# Altium PCB Hub_card.PcbDoc
Units mm, origin at the board's own origin, x right, y up, seen from the top; angles counter-clockwise.
Board outline 70 x 70 mm, 2 copper layers (Top Layer, Bottom Layer); 64 components, 47 nets, 137 pads, 8 vias.
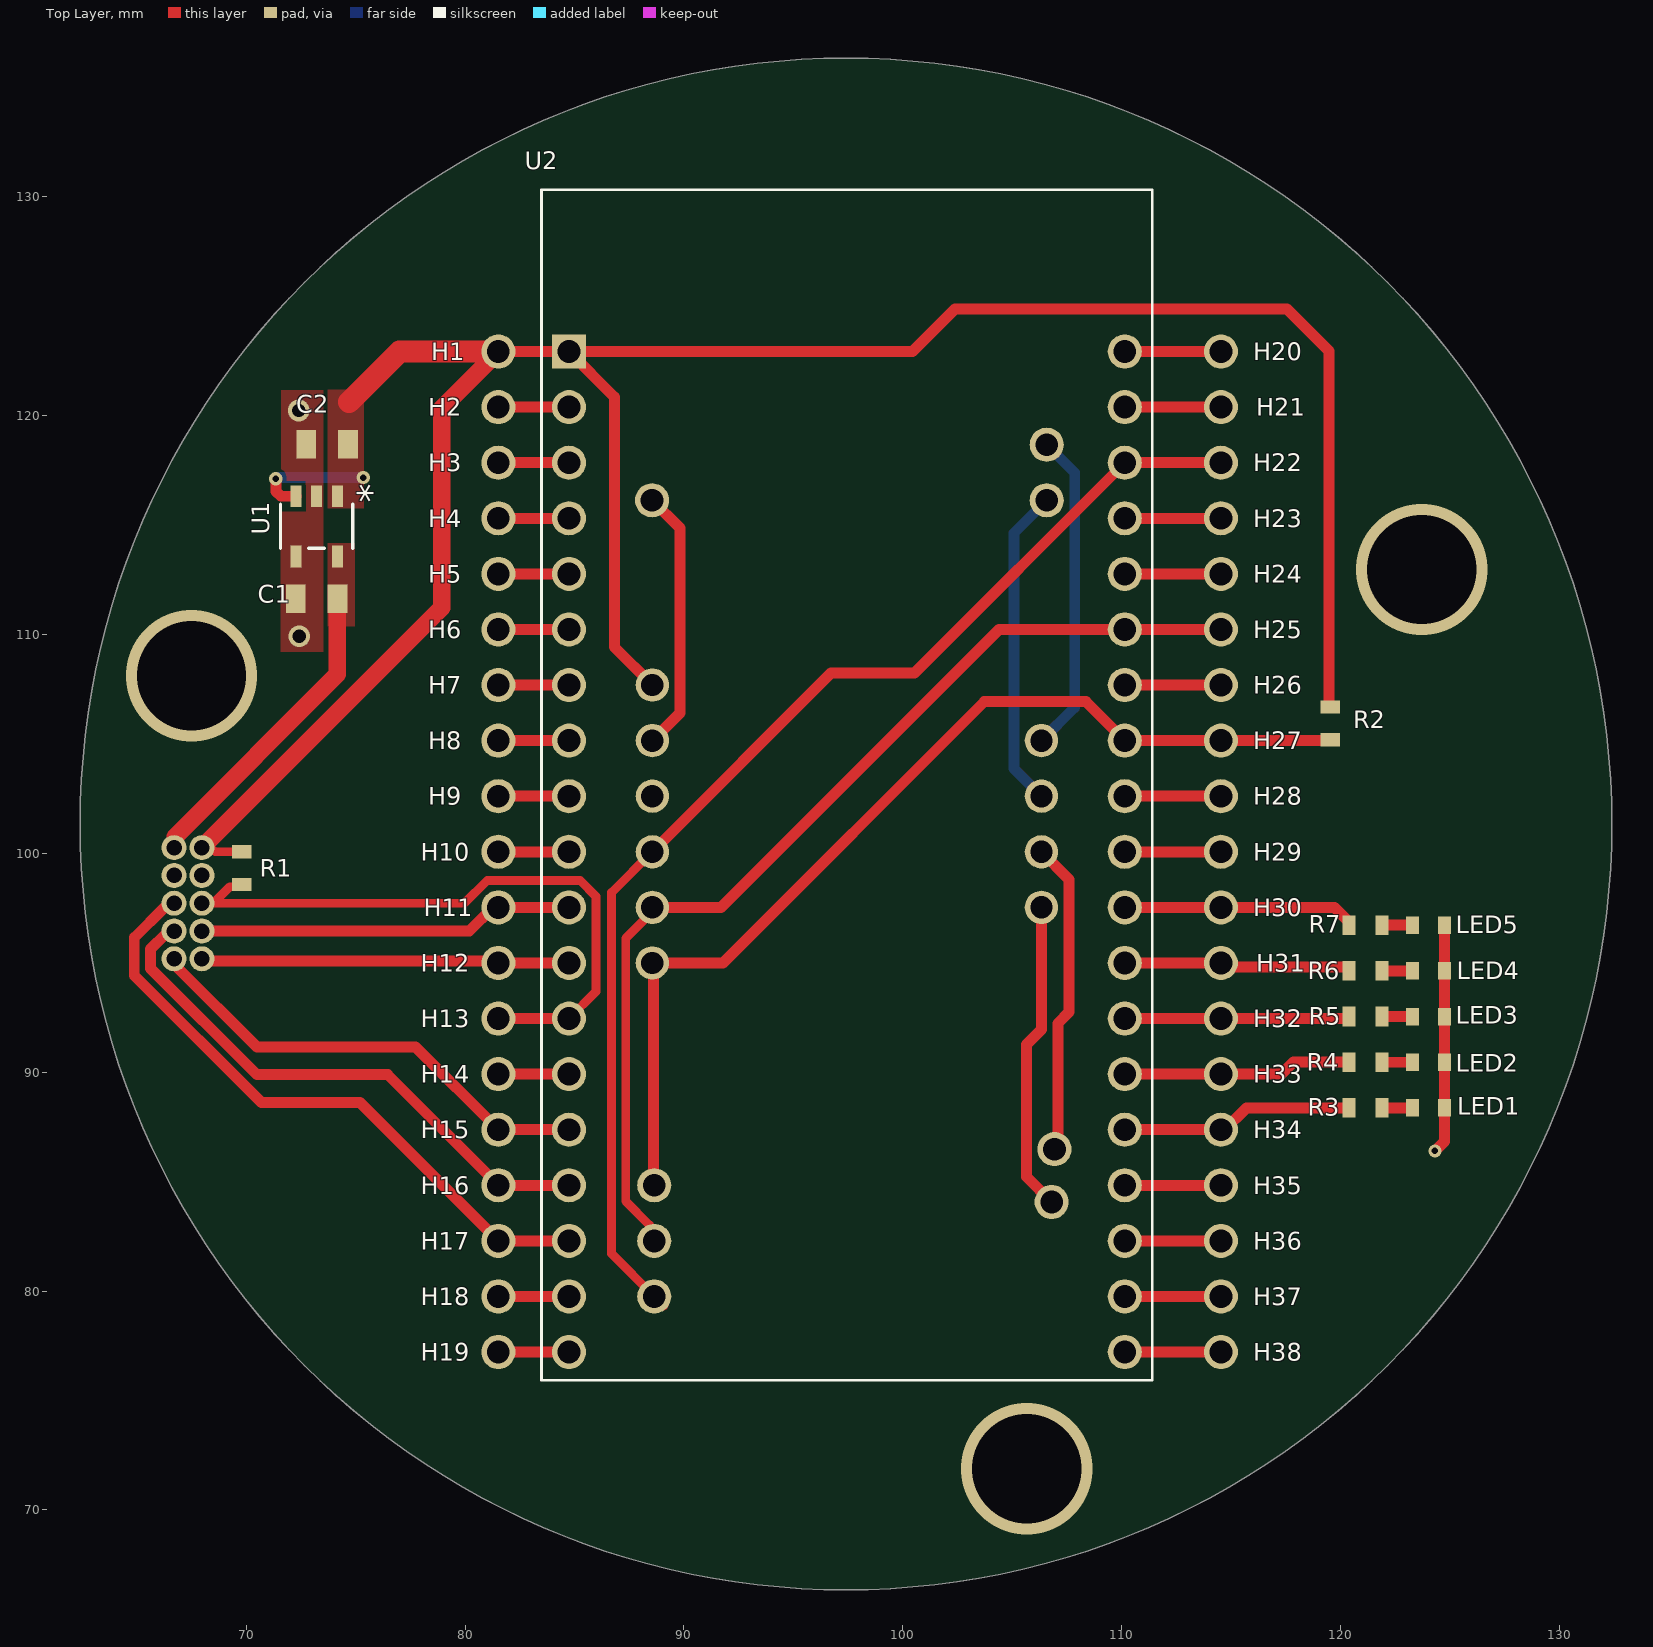
[diagram p0: Top Layer view]
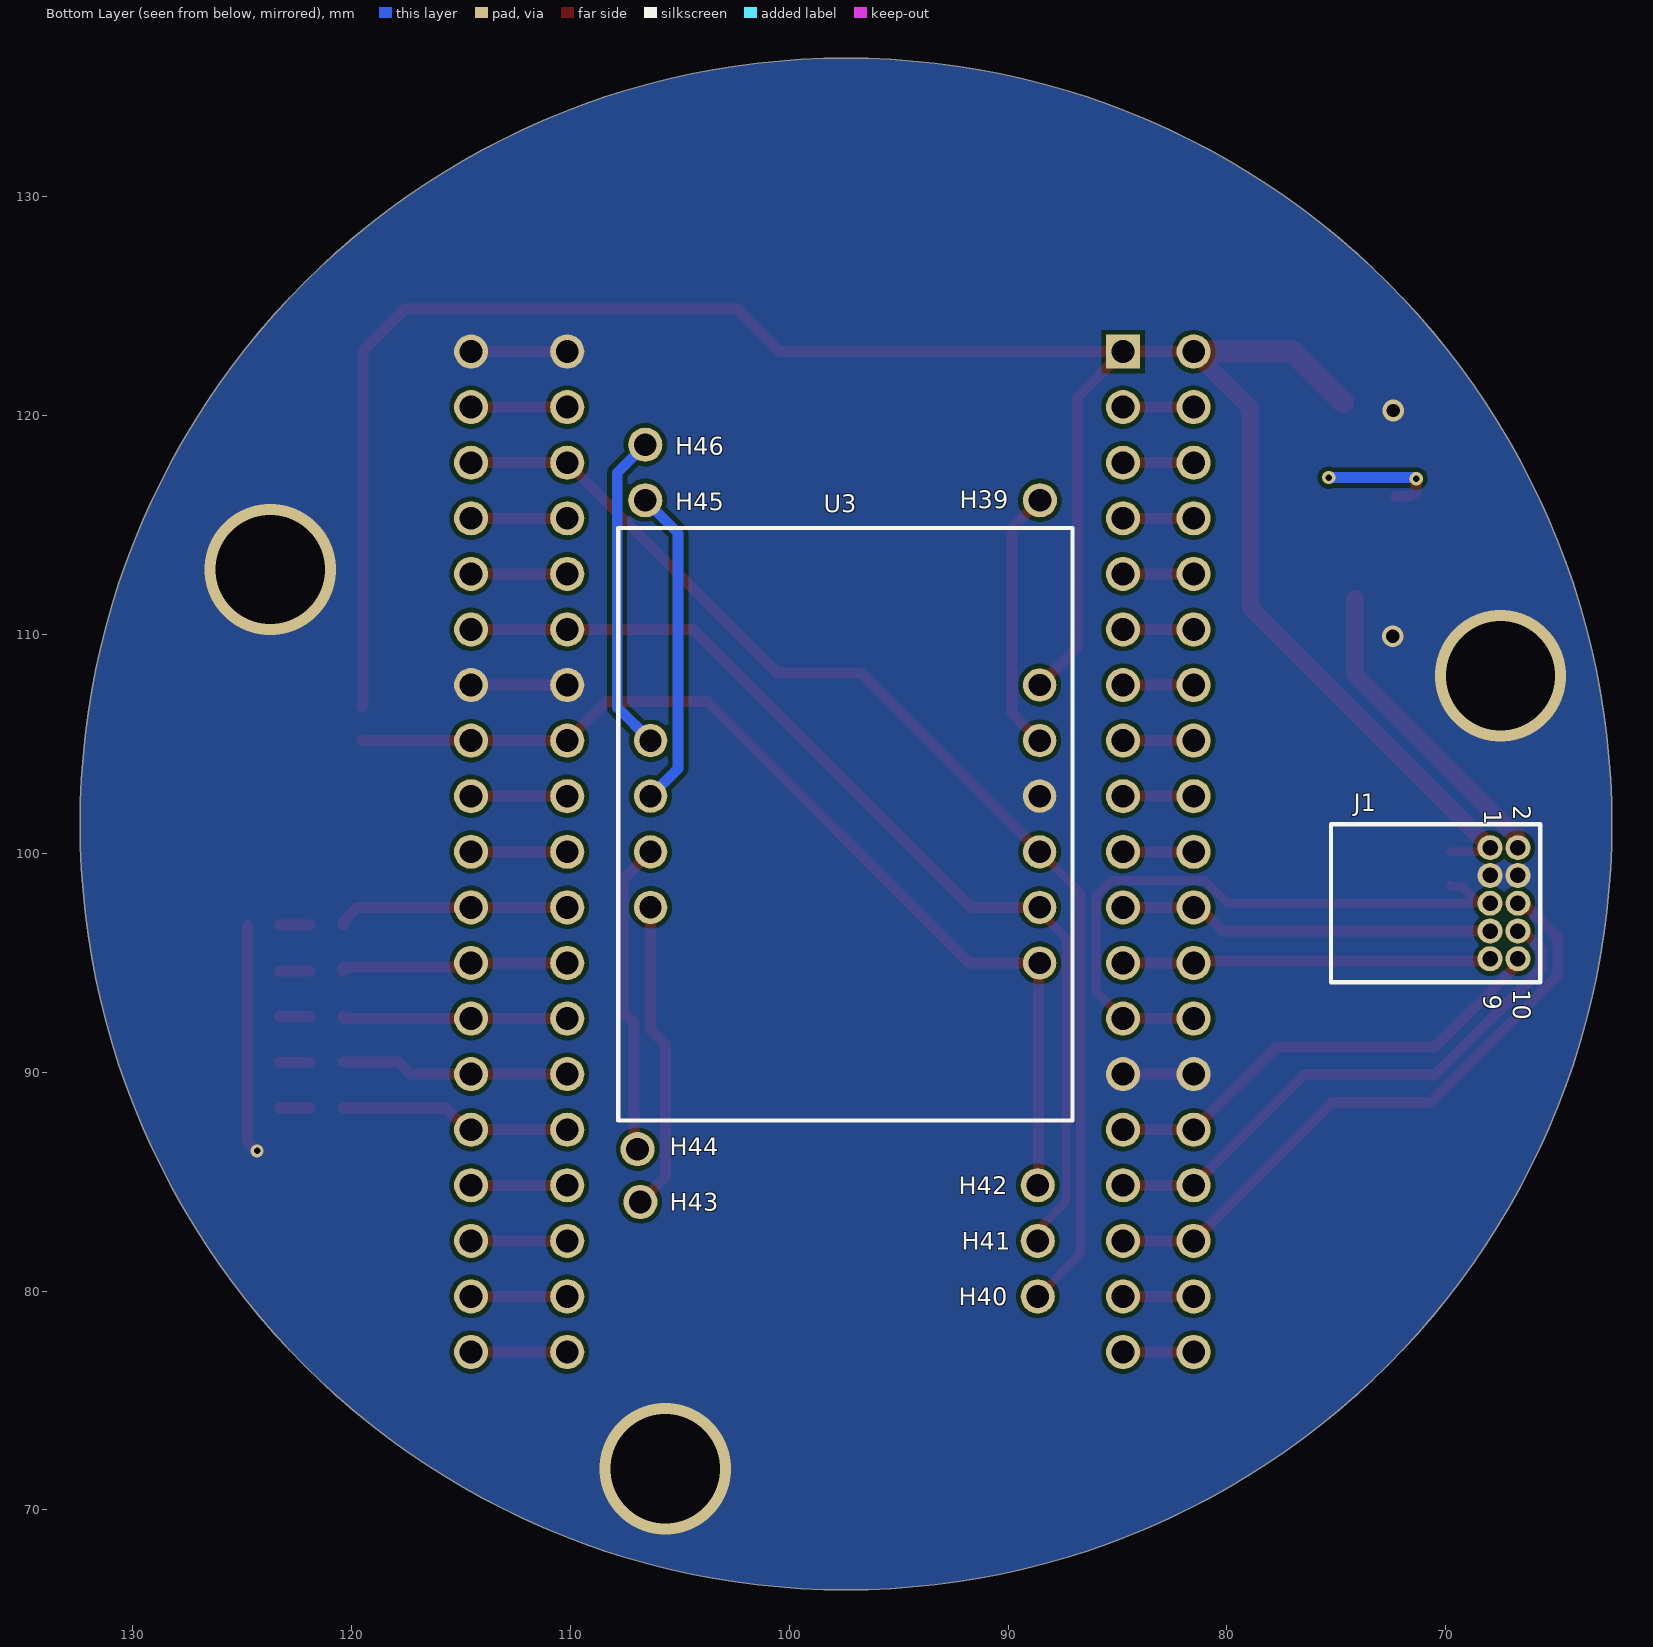
[diagram p1: Bottom Layer view, seen from below]
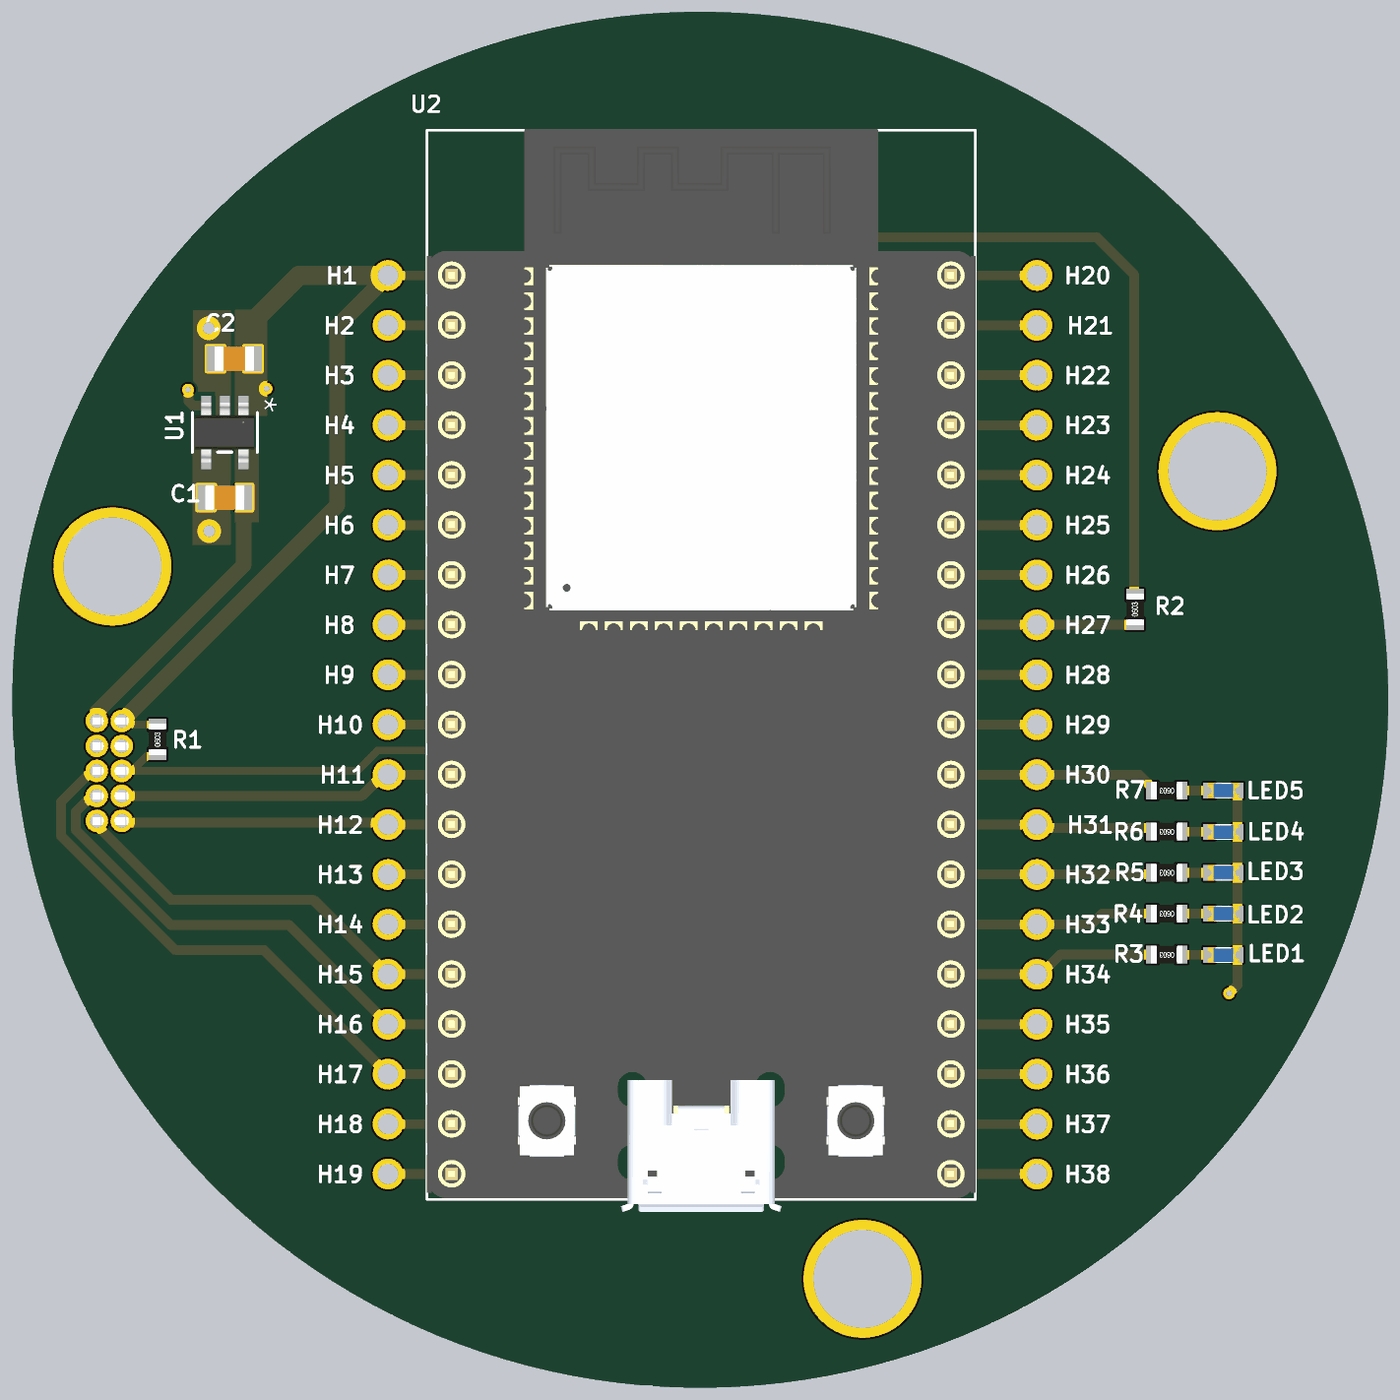
[diagram p2: 3D render of the assembled board from above, using the file's embedded part models]

## Layer stack, top to bottom
Top Solder: solder mask 0.0102, Solder Resist, Dk 3.5
Top Layer: signal copper 0.0356
Dielectric 1: dielectric 0.32, FR-4, Dk 4.8
Bottom Layer: signal copper 0.0356
Bottom Solder: solder mask 0.0102, Solder Resist, Dk 3.5

## Board outline
97.409,66.346 cw(c97.409,101.346) 62.409,101.346 cw(c97.409,101.346) 97.409,136.346 cw(c97.409,101.346) 132.409,101.346 cw(c97.409,101.346)

## Design rules (kind name [scope] priority, off if disabled: settings)
BoardOutlineClearance [All] p1: gap=0.2 ignorepadtopadclearanceinfootprint=FALSE except(0.4: Arc-SplitBarrior Arc-SplitContinuation Track-SplitBarrior Track-SplitContinuation SMDPad-SplitBarrior SMDPad-SplitContinuation THPad-SplitBarrior THPad-SplitContinuation Via-SplitBarrior Via-SplitContinuation Fill-SplitBarrior Fill-SplitContinuation Poly-SplitBarrior Poly-SplitContinuation Region-SplitBarrior Region-SplitContinuation Text-SplitBarrior Text-SplitContinuation)
Clearance "Clearance Bottom Layer" [OnLayer('Bottom Layer')] p1: gap=0.203 ignorepadtopadclearanceinfootprint=TRUE except(0.254: Arc-Text Track-Text SMDPad-Text THPad-Text Via-Text Fill-Text Poly-Text Region-Text Text-Text)
Clearance "Clearance Top Layer" [OnLayer('Top Layer')] p2: gap=0.203 ignorepadtopadclearanceinfootprint=TRUE except(0.254: Arc-Text Track-Text SMDPad-Text THPad-Text Via-Text Fill-Text Poly-Text Region-Text Text-Text)
Clearance [All] p3: gap=0.2 ignorepadtopadclearanceinfootprint=FALSE except(0.089: Arc-Arc Arc-Track Arc-SMDPad Track-Track Track-SMDPad SMDPad-SMDPad; 0.127: Arc-Via Track-Via SMDPad-Via THPad-Via Via-Via; 0.254: Arc-Text Track-Text SMDPad-Text THPad-Text Via-Text Fill-Text Poly-Text Region-Text Text-Text)
HoleSize [All] p1: absolutevalues=TRUE maxlimit=6.3 minlimit=0.2 maxpercent=80.000 minpercent=20.000
MinimumAnnularRing [All] p1: minimumring=0.076
MinimumSolderMaskSliver [All] p1: minsoldermaskwidth=0.1
PlaneConnect [All] p1: planeconnectstyle=Direct reliefexpansion=0.508 reliefentries=4 reliefconductorwidth=0.254 reliefairgap=0.254
PolygonConnect PolygonConnect_1 [All] p1: connectstyle=Direct reliefconductorwidth=0.508 reliefentries=4 polygonreliefangle="90 Angle" airgapwidth=0.254
RoutingCorners [All] p1: cornerstyle=Round minsetback=2.54 maxsetback=2.54
RoutingVias [All] p1: holewidth=0.5 width=1 viastyle="Through Hole" minholewidth=0.2 minwidth=0.45 maxholewidth=1 maxwidth=2
SilkToSilkClearance [All] p1: silktosilkclearance=0.1
SilkToSolderMaskClearance [IsPad] p1: minsilkscreentomaskgap=0.1 clearancetoexposedcopper=TRUE
SolderMaskExpansion [All] p1: expansion=0.102 istentingtop=FALSE
Width [All] p1: maxlimit=2.54 minlimit=0.089 preferedwidth=0.381
24 further rules are at their usual default settings.

## Components (designator, comment, footprint, x,y, rotation, side; value= is the part's Value field where it differs from the comment)
C1 "08053C105KAT2A" C0805 73.218,111.634 r0 top value=1uF
C2 "08053C105KAT2A" C0805 73.7,118.7 r0 top value=1uF
H1 "Via prove-point/connection" Hole 81.522,122.936 r90 top
H2 "Via prove-point/connection" Hole 81.522,120.396 r90 top
H3 "Via prove-point/connection" Hole 81.522,117.856 r90 top
H4 "Via prove-point/connection" Hole 81.522,115.316 r90 top
H5 "Via prove-point/connection" Hole 81.522,112.776 r90 top
H6 "Via prove-point/connection" Hole 81.522,110.236 r180 top
H7 "Via prove-point/connection" Hole 81.522,107.696 r180 top
H8 "Via prove-point/connection" Hole 81.522,105.156 r180 top
H9 "Via prove-point/connection" Hole 81.522,102.616 r180 top
H10 "Via prove-point/connection" Hole 81.522,100.076 r90 top
H11 "Via prove-point/connection" Hole 81.522,97.536 r180 top
H12 "Via prove-point/connection" Hole 81.522,94.996 r180 top
H13 "Via prove-point/connection" Hole 81.522,92.456 r180 top
H14 "Via prove-point/connection" Hole 81.522,89.916 r180 top
H15 "Via prove-point/connection" Hole 81.522,87.376 r90 top
H16 "Via prove-point/connection" Hole 81.522,84.836 r180 top
H17 "Via prove-point/connection" Hole 81.522,82.296 r180 top
H18 "Via prove-point/connection" Hole 81.522,79.756 r180 top
H19 "Via prove-point/connection" Hole 81.522,77.216 r90 top
H20 "Via prove-point/connection" Hole 114.542,122.936 r0 top
H21 "Via prove-point/connection" Hole 114.542,120.396 r0 top
H22 "Via prove-point/connection" Hole 114.542,117.856 r90 top
H23 "Via prove-point/connection" Hole 114.542,115.316 r90 top
H24 "Via prove-point/connection" Hole 114.542,112.776 r90 top
H25 "Via prove-point/connection" Hole 114.542,110.236 r180 top
H26 "Via prove-point/connection" Hole 114.542,107.696 r180 top
H27 "Via prove-point/connection" Hole 114.542,105.156 r180 top
H28 "Via prove-point/connection" Hole 114.542,102.616 r180 top
H29 "Via prove-point/connection" Hole 114.542,100.076 r180 top
H30 "Via prove-point/connection" Hole 114.542,97.536 r180 top
H31 "Via prove-point/connection" Hole 114.542,94.996 r180 top
H32 "Via prove-point/connection" Hole 114.542,92.456 r180 top
H33 "Via prove-point/connection" Hole 114.542,89.916 r180 top
H34 "Via prove-point/connection" Hole 114.542,87.376 r180 top
H35 "Via prove-point/connection" Hole 114.542,84.836 r180 top
H36 "Via prove-point/connection" Hole 114.542,82.296 r180 top
H37 "Via prove-point/connection" Hole 114.542,79.756 r180 top
H38 "Via prove-point/connection" Hole 114.542,77.216 r180 top
H39 "Via prove-point/connection" Hole 88.548,116.138 r270 bottom
H40 "Via prove-point/connection" Hole 88.646,79.756 r90 bottom
H41 "Via prove-point/connection" Hole 88.646,82.296 r90 bottom
H42 "Via prove-point/connection" Hole 88.646,84.836 r90 bottom
H43 "Via prove-point/connection" Hole 106.807,84.074 r270 bottom
H44 "Via prove-point/connection" Hole 106.934,86.487 r270 bottom
H45 "Via prove-point/connection" Hole 106.582,116.138 r270 bottom
H46 "Via prove-point/connection" Hole 106.582,118.678 r270 bottom
J1 "5X2 header, 1.27mm, right-angle" "5X2 header, 1.27mm, right-angle" 74.376,109.595 r270 bottom
LED1 "LED Blue" "L0603 BLUE" 124.028,88.369 r0 top
LED2 "LED Blue" "L0603 BLUE" 124.028,90.456 r0 top
LED3 "LED Blue" "L0603 BLUE" 124.028,92.543 r0 top
LED4 "LED Blue" "L0603 BLUE" 124.028,94.63 r0 top
LED5 "LED Blue" "L0603 BLUE" 124.028,96.717 r0 top
R1 "CPF-A-0603B100KE1" R0603 69.8,99.325 r90 top value=10K
R2 "CPF-A-0603B100KE1" R0603 119.532,105.943 r90 top value=10K
R3 "CPF-A-0603B100KE1" R0603 121.15,88.376 r180 top value=500R
R4 "CPF-A-0603B100KE1" R0603 121.15,90.463 r180 top value=500R
R5 "CPF-A-0603B100KE1" R0603 121.15,92.55 r180 top value=500R
R6 "CPF-A-0603B100KE1" R0603 121.15,94.637 r180 top value=500R
R7 "CPF-A-0603B100KE1" R0603 121.15,96.724 r180 top value=500R
U1 "TLV70019DDCT" TLV70019DDCT 73.218,114.948 r270 top
U2 "ESP32-DEVKITC-32D" ESP32 98.211,102.287 r0 top
U3 "Adafruit BN055" "Adafruit BN055" 88.559,107.696 r0 bottom locked

## Footprints (in the part's own frame and the unit in brackets; to place one, negate y for a bottom-side part, rotate by r counter-clockwise, add the part's x,y. Pads: shape width x height; smd on the part's side, far side on the other; paste and mask are expansions set on the pad)
"5X2 header, 1.27mm, right-angle" [mil]
  round 45 hole 27.95: 1(367.32,252.01) 2(367.32,302.01) 3(417.32,252.01) 4(417.32,302.01) 5(467.32,252.01) 6(467.32,302.01) 7(517.32,252.01) 8(517.32,302.01) 9(567.32,252.01) 10(567.32,302.01)
  silkscreen extent 325,-34 609,342, body extent 344,-16 591,311, height 136
"Adafruit BN055" [mil] "Adafruit BN055"
  round 60 hole 40.16: 1(0,0) 2(0,100) 3(0,200) 4(0,300) 5(0,400) 6(0,500) 7(700,100) 8(700,200) 9(700,300) 10(700,400)
  silkscreen extent -59,-282 758,783, body extent -50,-275 750,775, height 164
C0805 [mm]
  rect 0.9x1.3 smd: 1(-0.95,0) 2(0.95,0)
  body extent -1,-0.62 1,0.62, height 0.8
ESP32 [mm]
  rect 1.56x1.56 hole 1.04: 1(-13.462,20.649)
  round 1.56 hole 1.04: 2(-13.462,18.109) 3(-13.462,15.569) 4(-13.462,13.029) 5(-13.462,10.489) 6(-13.462,7.949) 7(-13.462,5.409) 8(-13.462,2.869) 9(-13.462,0.329) 10(-13.462,-2.211) 11(-13.462,-4.751) 12(-13.462,-7.291) 13(-13.462,-9.831) 14(-13.462,-12.371) 15(-13.462,-14.911) 16(-13.462,-17.451) 17(-13.462,-19.991) 18(-13.462,-22.531) 19(-13.462,-25.071) 20(11.938,20.649) 21(11.938,18.109) 22(11.938,15.569) 23(11.938,13.029) 24(11.938,10.489) 25(11.938,7.949) 26(11.938,5.409) 27(11.938,2.869) 28(11.938,0.329) 29(11.938,-2.211) 30(11.938,-4.751) 31(11.938,-7.291) 32(11.938,-9.831) 33(11.938,-12.371) 34(11.938,-14.911) 35(11.938,-17.451) 36(11.938,-19.991) 37(11.938,-22.531) 38(11.938,-25.071)
  silkscreen extent -14.71,-26.36 13.19,28.04, body extent -14.72,-27 13.22,28.1, height 4.16
Hole [mm]
  round 1.56 hole 1.04: 1(0,0)
"L0603 BLUE" [mm]
  rect 0.6x0.8 smd: 1(-0.725,0) 2(0.725,0)
  body extent -0.8,-0.4 0.8,0.4, height 0.6
R0603 [mm]
  rect 0.6x0.9 smd: 1(-0.75,0) 2(0.75,0)
  body extent -0.8,-0.45 0.8,0.45, height 0.5
TLV70019DDCT [mil]
  rect 39.28x20 smd paste+0 mask+0: 1(-54.14,37.4) 2(-54.14,0) 3(-54.14,-37.4) 4(54.14,-37.4) 5(54.14,37.4)
  silkscreen extent -40,-65 40,65, body extent -60,-60 60,60, height 43

## Part data
C1 C2: "C0805"
H1 H2 H3 H4 H5 H6 H7 H8 H9 H10 H11 H12 H13 H14 H15 H16 H17 H18 H19 H20 H21 H22 H23 H24 H25 H26 H27 H28 H29 H30 H31 H32 H33 H34 H35 H36 H37 H38 H39 H40 H41 H42 H43 H44 H45 H46: library part Hole
LED1 LED2 LED3 LED4 LED5: library part HSMG-C199, "LED 0603 Blue", Color=Blue
R1 R2 R3 R4 R5 R6 R7: "R0603"
U1: Supplier Part Number 1=296-30508-1-ND, ComponentLink1Description="New link", ComponentLink1URL=https://no.farnell.com/texas-instruments/tlv70019ddct/ldo-reg-0-175vdo-0-2a-1-9v-5sot23/dp/3007766RL?st=regulator, Supplier 1=Digi-Key
U2: "ESP32-DEVKITC-32D module."

## Via types
v1: diameter 6, hole 5, Top Layer to Bottom Layer, 3 vias
v2: diameter 0.6, hole 0.3, Top Layer to Bottom Layer, 3 vias
v3: diameter 1, hole 0.6, Top Layer to Bottom Layer, 2 vias

## Nets (pads, with @x,y where several pads share a name; then routed paths per layer and width w, separated by ;. In a path a pad name is that pad's centre, name@x,y a point inside that pad or via, vN(x,y) a via of type N, cw(c..) or ccw(c..) an arc to the next point about the centre after c; other vN are vias at no path point)
1V9: C1.2 J1.2 U1.5 | length 14.5
  Top Layer w0.8: J1.2 66.753,100.313 66.753,100.771 74.168,108.185 C1.2
3v3: C2.2 H1.1 J1.1 R1.2 R2.2 U1.1 U1.3 U2.1 U3.1 | length 116.2
  Top Layer w0.4: J1.1 68.117,100.123 68.534,100.123 68.581,100.076 R1.2 R1.2
  Top Layer w0.5: v2(71.35,117.125) 71.369,117.106 71.369,116.547 71.593,116.323 U1.3 ; H1.1 U2.1 ; U3.1 86.821,109.434 86.821,120.864 U2.1 ; R2.2 119.482,106.743 119.482,122.961 117.555,124.888 102.393,124.888 100.441,122.936 U2.1
  Top Layer w0.8: J1.1 78.936,111.226 78.936,120.35 H1.1
  Top Layer w1: 74.7,120.625 77.011,122.936 H1.1
  Bottom Layer w0.5: v2(71.35,117.125) 71.4,117.175 v2(75.35,117.175)
BN_3V: H39.1 U3.2 | length 12.1
  Top Layer w0.5: H39.1 89.821,114.865 89.821,106.418 U3.2
  Bottom Layer w0.5: H39.1 H39.1@88.578,116.108
BN_RST: H27.1 H42.1 R2.1 U2.27 U3.6 | length 46.8
  Top Layer w0.5: H42.1@88.602,84.836 88.602,94.952 U3.6 91.789,94.996 103.727,106.934 108.371,106.934 U2.27 ; U2.27@110.236,105.156 H27.1 119.495,105.156 R2.1
BN_SCL: H22.1 H40.1 U2.22 U3.4 | length 55.7
  Top Layer w0.4: U3.4 86.698,98.215 86.698,81.704 H40.1
  Top Layer w0.5: U3.4 96.721,108.238 100.531,108.238 U2.22 ; H40.1 H40.1@89.041,79.361 ; U2.22@110.236,117.856 H22.1
BN_SDA: H25.1 H41.1 U2.25 U3.5 | length 47.4
  Top Layer w0.4: U3.5 88.559,97.336 87.347,96.124 87.347,84.101 88.424,83.024 88.424,82.518 H41.1
  Top Layer w0.5: U3.5 91.694,97.536 104.394,110.236 U2.25 ; U2.25@110.236,110.236 H25.1
GND: C1.1 C2.1 H14.1 H20.1 H26.1 J1.3 J1.4 LED1.2 LED2.2 LED3.2 LED4.2 LED5.2 U1.2 U1.4 U2.14 U2.20 U2.26 U3.3 | length 22.4
  Top Layer w0.5: H14.1 U2.14@84.836,89.916 ; U2.26@110.236,107.696 H26.1 ; U2.20@110.236,122.936 H20.1 ; v2(124.318,86.408) 124.753,86.844 LED1.2 LED2.2 LED3.2 LED4.2 LED5.2
  other v1: 105.664,71.882 67.5,108.125 123.725,112.975
  other v3: 72.425,109.925 72.4,120.25
LED1: H34.1 R3.2 U2.34 | length 10.6
  Top Layer w0.5: U2.34@110.236,87.376 H34.1 114.706,87.376 115.706,88.376 R3.2
LED2: H33.1 R4.2 U2.33 | length 10.4
  Top Layer w0.5: U2.33@110.236,89.916 H33.1 117.316,89.916 117.863,90.463 R4.2
LED3: H32.1 R5.2 U2.32 | length 10.2
  Top Layer w0.5: U2.32@110.236,92.456 H32.1 120.35,92.456 120.4,92.506 R5.2
LED4: H31.1 R6.2 U2.31 | length 10.4
  Top Layer w0.5: U2.31@110.236,94.996 H31.1 114.721,94.816 120.35,94.816 120.4,94.766 R6.2
LED5: H30.1 R7.2 U2.30 | length 10.6
  Top Layer w0.5: U2.30@110.236,97.536 H30.1 119.738,97.536 120.4,96.874 R7.2
MISO: H13.1 J1.5 R1.1 U2.13 | length 29.7
  Top Layer w0.4: J1.5 J1.5@68.5,97.725 ; R1.1 69.7,98.475 69.25,98.475 J1.5@68.5,97.725 ; U2.13 85.979,93.686 85.979,98.045 85.258,98.766 81.012,98.766 79.971,97.725 J1.5@68.5,97.725
  Top Layer w0.5: H13.1 U2.13
MOSI: H15.1 J1.10 U2.15 | length 21.5
  Top Layer w0.5: J1.10 66.828,95.062 66.828,94.817 70.485,91.16 77.738,91.16 H15.1 U2.15 U2.15@84.836,87.376
MOTION: H16.1 J1.8 U2.16 | length 25.6
  Top Layer w0.5: J1.8 66.582,96.332 66.337,96.332 65.634,95.629 65.634,94.741 70.485,89.89 76.468,89.89 H16.1 U2.16 U2.16@84.836,84.836
NCS: H11.1 J1.7 U2.11 | length 17.3
  Top Layer w0.5: J1.7 80.193,96.455 81.274,97.536 H11.1 U2.11 U2.11@84.836,97.536
NetH2_1: H2.1 U2.2 | length 3.3
  Top Layer w0.5: H2.1 U2.2@84.836,120.396
NetH3_1: H3.1 U2.3 | length 3.3
  Top Layer w0.5: H3.1 U2.3@84.836,117.856
NetH4_1: H4.1 U2.4 | length 3.3
  Top Layer w0.5: H4.1 U2.4@84.836,115.316
NetH5_1: H5.1 U2.5 | length 3.3
  Top Layer w0.5: H5.1 U2.5@84.836,112.776
NetH6_1: H6.1 U2.6 | length 3.3
  Top Layer w0.5: H6.1 U2.6@84.836,110.236
NetH7_1: H7.1 U2.7 | length 3.3
  Top Layer w0.5: H7.1 U2.7@84.836,107.696
NetH8_1: H8.1 U2.8 | length 3.3
  Top Layer w0.5: H8.1 U2.8@84.836,105.156
NetH9_1: H9.1 U2.9 | length 3.3
  Top Layer w0.5: H9.1 U2.9@84.836,102.616
NetH10_1: H10.1 U2.10 | length 3.3
  Top Layer w0.5: H10.1 U2.10@84.836,100.076
NetH18_1: H18.1 U2.18 | length 3.3
  Top Layer w0.5: H18.1 U2.18@84.836,79.756
NetH19_1: H19.1 U2.19 | length 3.3
  Top Layer w0.5: H19.1 U2.19@84.836,77.216
NetH21_1: H21.1 U2.21 | length 4.3
  Top Layer w0.5: U2.21@110.236,120.396 H21.1
NetH23_1: H23.1 U2.23 | length 4.3
  Top Layer w0.5: U2.23@110.236,115.316 H23.1
NetH24_1: H24.1 U2.24 | length 4.3
  Top Layer w0.5: U2.24@110.236,112.776 H24.1
NetH28_1: H28.1 U2.28 | length 4.3
  Top Layer w0.5: U2.28@110.236,102.616 H28.1
NetH29_1: H29.1 U2.29 | length 4.3
  Top Layer w0.5: U2.29@110.236,100.076 H29.1
NetH35_1: H35.1 U2.35 | length 4.3
  Top Layer w0.5: U2.35@110.236,84.836 H35.1
NetH36_1: H36.1 U2.36 | length 4.3
  Top Layer w0.5: U2.36@110.236,82.296 H36.1
NetH37_1: H37.1 U2.37 | length 4.3
  Top Layer w0.5: U2.37@110.236,79.756 H37.1
NetH38_1: H38.1 U2.38 | length 4.3
  Top Layer w0.5: U2.38@110.236,77.216 H38.1
NetH43_1: H43.1 U3.10 | length 14.2
  Top Layer w0.5: U3.10 106.339,91.95 105.654,91.265 105.654,85.227 H43.1
NetH44_1: H44.1 U3.9 | length 14.4
  Top Layer w0.5: U3.9 107.601,98.814 107.601,92.75 107.088,92.237 107.088,86.641 H44.1
NetH45_1: H45.1 U3.8 | length 14.7
  Bottom Layer w0.5: U3.8 105.077,103.878 105.077,114.633 H45.1
NetH46_1: H46.1 U3.7 | length 14.7
  Bottom Layer w0.5: U3.7 107.862,106.679 107.862,117.398 H46.1 H46.1@106.552,118.648
NetLED1_1: LED1.1 R3.1 | length 1.4
  Top Layer w0.5: R3.1 121.904,88.372 123.3,88.372 LED1.1
NetLED2_1: LED2.1 R4.1 | length 1.4
  Top Layer w0.5: R4.1 121.904,90.459 123.3,90.459 LED2.1
NetLED3_1: LED3.1 R5.1 | length 1.4
  Top Layer w0.5: R5.1 121.904,92.546 123.3,92.546 LED3.1
NetLED4_1: LED4.1 R6.1 | length 1.4
  Top Layer w0.5: R6.1 121.904,94.633 123.3,94.633 LED4.1
NetLED5_1: LED5.1 R7.1 | length 1.4
  Top Layer w0.5: R7.1 121.904,96.721 123.3,96.721 LED5.1
NRESET: H17.1 J1.6 U2.17 | length 29.2
  Top Layer w0.5: J1.6 66.531,97.725 66.333,97.526 66.261,97.526 64.885,96.15 64.885,94.431 70.695,88.62 75.198,88.62 H17.1 U2.17 U2.17@84.836,82.296
SCLK: H12.1 J1.9 U2.12 | length 16.9
  Top Layer w0.5: J1.9 68.069,95.091 81.427,95.091 H12.1 U2.12 U2.12@84.836,94.996

## Polygon pours and split planes (outlines as drawn)
GND on Bottom Layer "NONET_L-01_P-001" (solid, pour order 4): 58.325,153.67 150.368,153.67 150.368,49.149 149.987,48.768 149.86,48.895 58.325,48.785
GND on Top Layer "GND_L01_P006" (solid, pour order 6): 71.6,116.84 71.6,121.175 73.525,121.175 73.525,109.225 71.575,109.225 71.575,115.625 72.75,115.625 72.75,116.84
1V9 on Top Layer "1V9_L01_P007" (solid, pour order 7): 73.625,110.375 74.95,110.375 74.95,114.175 73.625,114.175
3v3 on Top Layer "3V3_L01_P005" (solid, pour order 5): 73.725,121.2 73.725,115.775 75.375,115.775 75.375,121.2

## Silkscreen, mask and mechanical layers (free items; w line width, h text height)
Mechanical 1:
  circle w0.1: c97.409,101.346 r35

## Text inside footprints (layer, text, board x,y; h text height)
J1: Bottom Overlay "1" at 68.243,102.008 h0.8 r90; Bottom Overlay "9" at 68.256,93.546 h0.8 r90; Bottom Overlay "10" at 66.908,93.8 h0.8 r90; Bottom Overlay "2" at 66.908,102.196 h0.8 r90; Mechanical 16 "10" at 66.908,93.8 h0.8 r90; Mechanical 16 "2" at 66.908,102.196 h0.8 r90; Mechanical 16 "1" at 68.243,102.008 h0.8 r90; Mechanical 16 "9" at 68.256,93.546 h0.8 r90; Mechanical 40 "1.143" at 64.596,93.242 h0.39 r90; Mechanical 40 "5.080" at 63.708,98.385 h0.39 r90; Mechanical 40 "1.143" at 66.819,93.813 h0.39 r90; Mechanical 40 "6.350" at 74.884,98.385 h0.39 r90; Mechanical 40 "1.270" at 64.724,102.894 h0.39 r90; Mechanical 40 "1.270" at 67.454,105.878 h0.39 r90; Mechanical 40 "2.540" at 70.629,107.783 h0.39 r90
U1: Top Overlay "*" at 74.549,116.894 h1.27 r270; Mechanical 13 "*" at 73.584,115.887 h1.27 r270